# EAGLE board Rev2 Logicar (EAGLE 9.1.3)
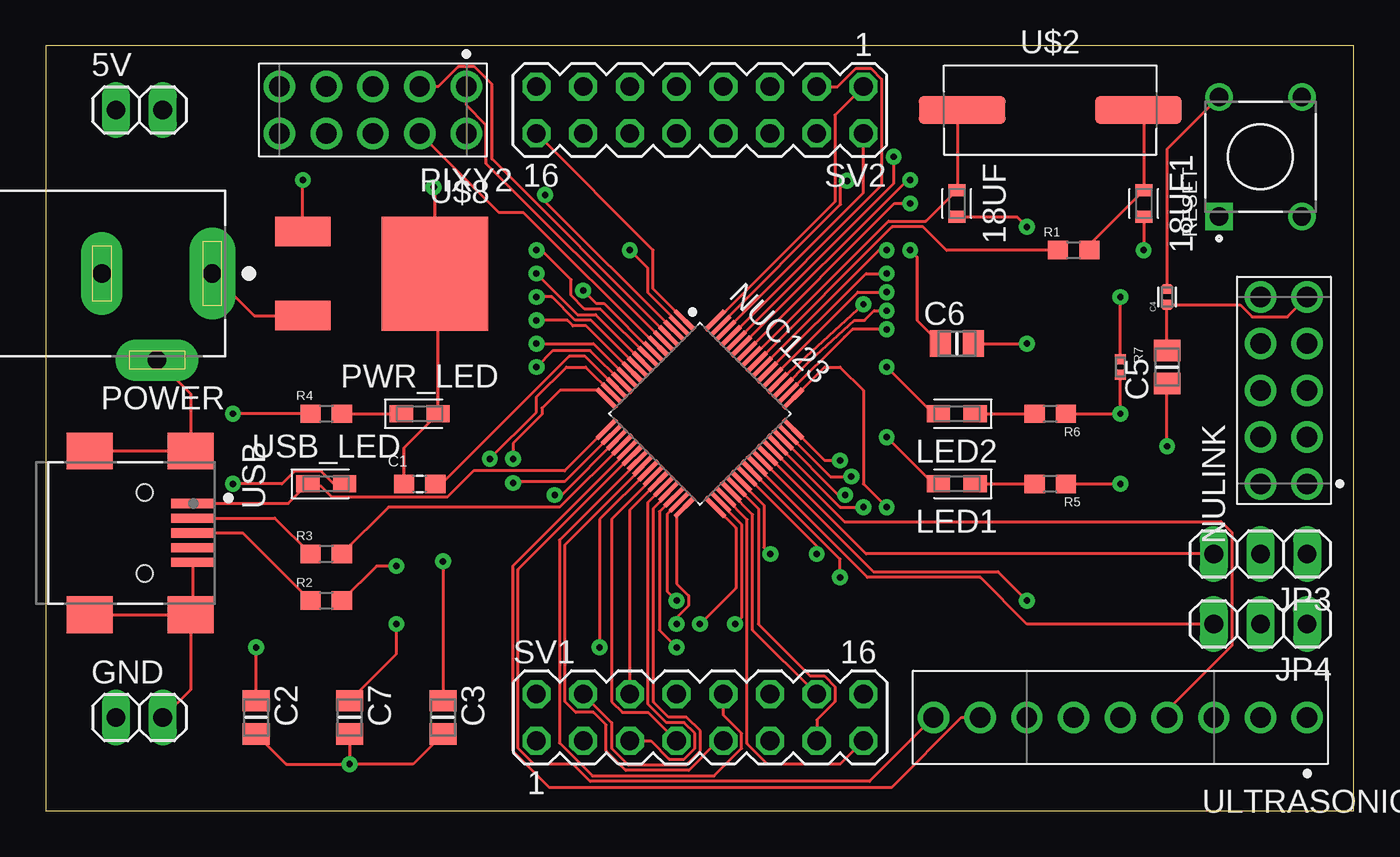
[diagram p0: board, top side]
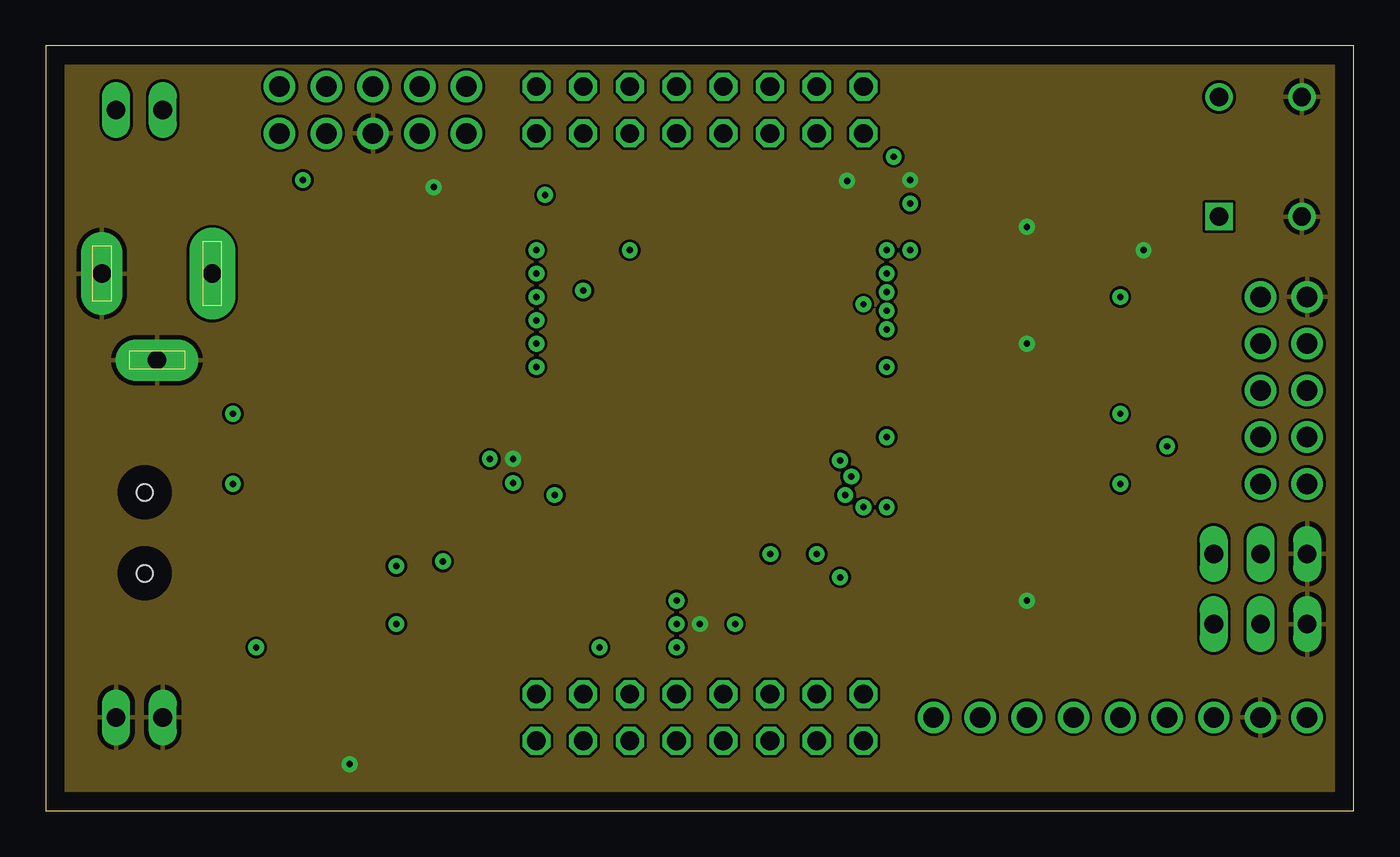
[diagram p1: board, inner layer Route2]
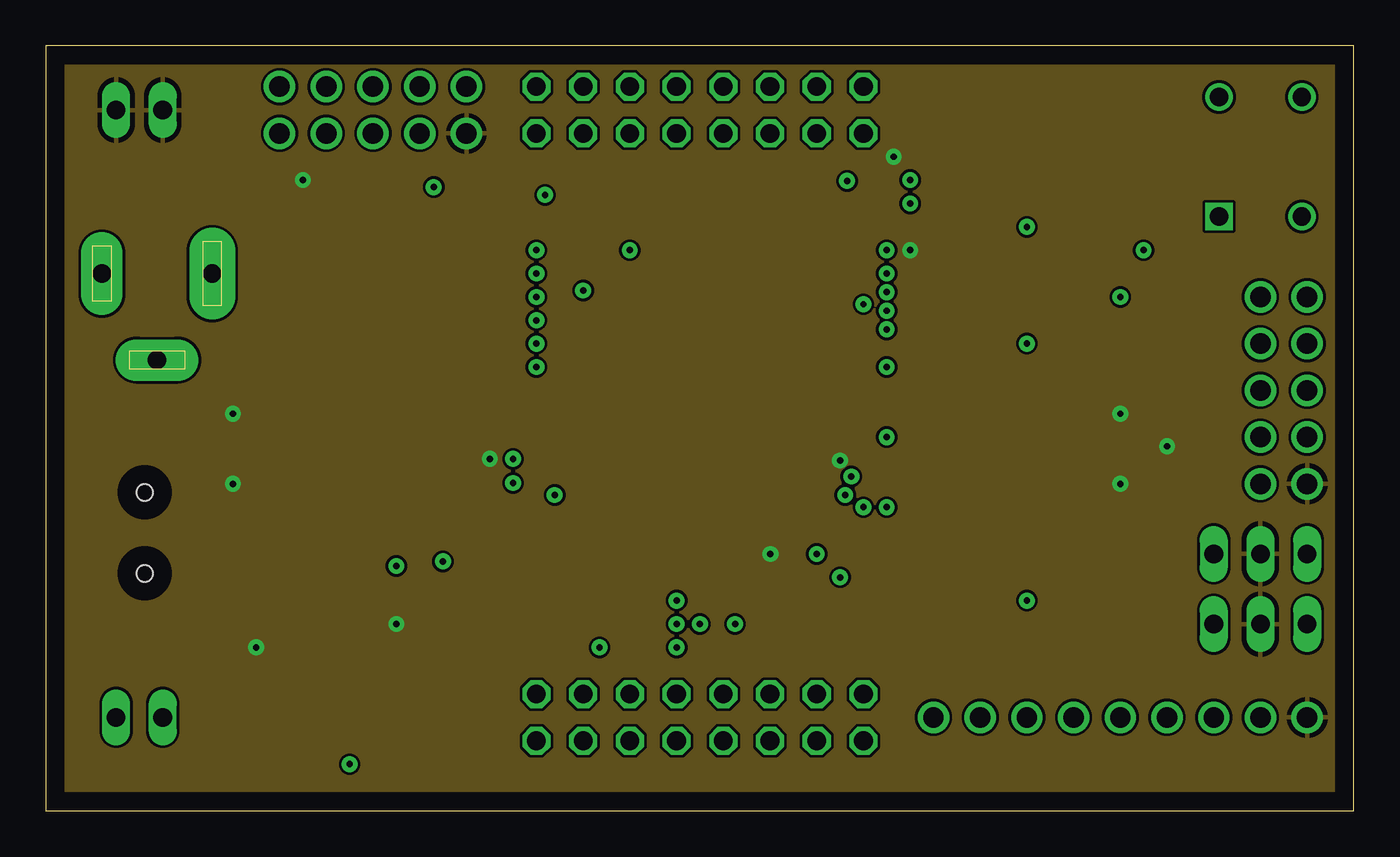
[diagram p2: board, inner layer Route15]
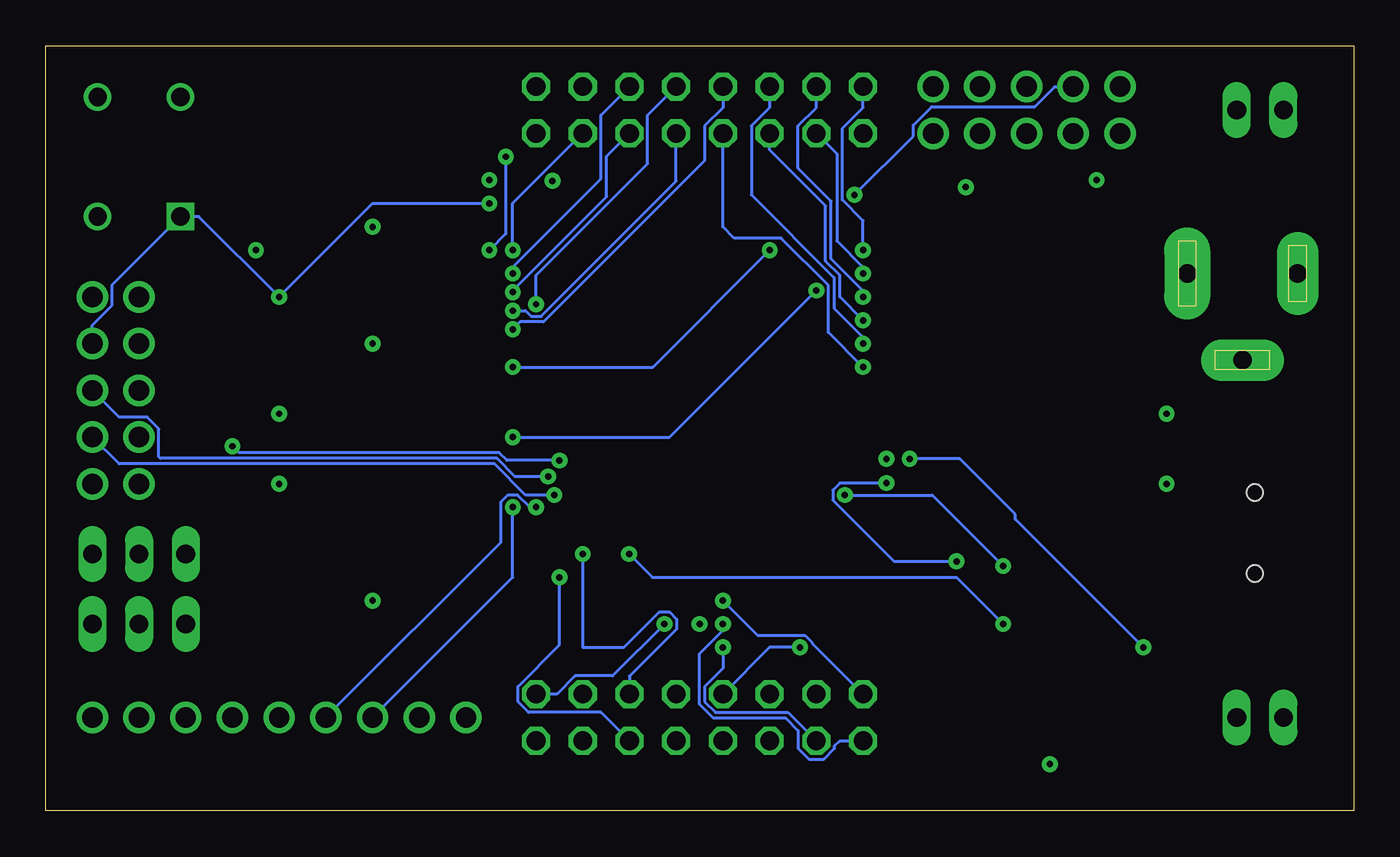
[diagram p3: board, bottom side, seen from below]

Size 71.1 x 41.58 mm. Coordinates in mm from the lower left corner, seen from the top.
Outline: 0,0 71.1,0 71.1,41.58 0,41.58 0,0
Copper layers (1*2*15*16): Top 0.035559375mm / dielectric 62mil / Route2 0.035559375mm / dielectric 62mil / Route15 0.035559375mm / dielectric 62mil / Bottom 0.035559375mm
Design rules "cmpe492-4Layer": minimum track width 6mil, minimum drill 8mil, track to track 6mil, track to pad 6mil, pad to pad 6mil, via to via 6mil, smd to smd 6mil, copper to edge 40mil, drill to drill 20mil, minimum pad ring 10mil, minimum via ring 10mil, stop-mask expansion 4mil, vias tented up to drill 0mil, thermal gap 10mil

## Footprints (pad centres in the part's own frame; a part is rotated, then mirrored left to right if it is on the bottom)
1X02 = drill 1.016 long: 1 -1.27,0; 2 1.27,0
CAPC1608X70 = smd 0.662 x 0.922: 1 -0.725,0; 2 0.725,0
CAPC1608X90 = smd 1.1 x 1: 1 -0.85,0; 2 0.85,0
CAPC2012X140N = smd 1.15 x 1.45: 1 -0.9,0; 2 0.9,0
CAPC1005X55N = smd 0.54 x 0.6: 1 -0.43,0; 2 0.43,0
1X03 = drill 1.016 long: 1 -2.54,0; 2 0,0; 3 2.54,0
LEDC2408X70 = smd 1.262 x 0.912: 1 -1,0; 2 1,0
QFP40P900X900X160-64 = smd 1.469 x 0.24: 1 -4.171,3; 2 -4.171,2.6; 3 -4.171,2.2; 4 -4.171,1.8; 5 -4.171,1.4; 6 -4.171,1; 7 -4.171,0.6; 8 -4.171,0.2; 9 -4.171,-0.2; 10 -4.171,-0.6; 11 -4.171,-1; 12 -4.171,-1.4; 13 -4.171,-1.8; 14 -4.171,-2.2; 15 -4.171,-2.6; 16 -4.171,-3; 33 4.171,-3; 34 4.171,-2.6; 35 4.171,-2.2; 36 4.171,-1.8; 37 4.171,-1.4; 38 4.171,-1; 39 4.171,-0.6; 40 4.171,-0.2; 41 4.171,0.2; 42 4.171,0.6; 43 4.171,1; 44 4.171,1.4; 45 4.171,1.8; 46 4.171,2.2; 47 4.171,2.6; 48 4.171,3 | smd 0.24 x 1.469: 17 -3,-4.171; 18 -2.6,-4.171; 19 -2.2,-4.171; 20 -1.8,-4.171; 21 -1.4,-4.171; 22 -1,-4.171; 23 -0.6,-4.171; 24 -0.2,-4.171; 25 0.2,-4.171; 26 0.6,-4.171; 27 1,-4.171; 28 1.4,-4.171; 29 1.8,-4.171; 30 2.2,-4.171; 31 2.6,-4.171; 32 3,-4.171; 49 3,4.171; 50 2.6,4.171; 51 2.2,4.171; 52 1.8,4.171; 53 1.4,4.171; 54 1,4.171; 55 0.6,4.171; 56 0.2,4.171; 57 -0.2,4.171; 58 -0.6,4.171; 59 -1,4.171; 60 -1.4,4.171; 61 -1.8,4.171; 62 -2.2,4.171; 63 -2.6,4.171; 64 -3,4.171
NUVI-LINK = drill 1.105 pad 1.705: 1 0,0; 2 2.54,0; 3 5.08,0; 4 7.62,0; 5 10.16,0; 6 10.16,2.54; 7 7.62,2.54; 8 5.08,2.54; 9 2.54,2.54; 10 0,2.54
PIXY2PIN = drill 1.105 pad 1.705: 1 0,0; 2 0,2.54; 3 2.54,0; 4 2.54,2.54; 5 5.08,0; 6 5.08,2.54; 7 7.62,0; 8 7.62,2.54; 9 10.16,0; 10 10.16,2.54
CUI_PJ-202A = drill 1 pad 2.5 long: 1 -6.5,0 | drill 1 pad 2.25 long: 2 -0.5,0; 3 -3.5,4.7
RESC1608X55 = smd 1.1 x 1: 1 -0.85,0; 2 0.85,0
RESC1005X40 = smd 0.54 x 0.6: 1 -0.43,0; 2 0.43,0
SW_1825910-6-4 = drill 0.99 square: 1 -3.25,2.25 | drill 0.99: 2 3.25,2.25; 3 -3.25,-2.25; 4 3.25,-2.25
MA08-2 = drill 1.016 octagon: 1 -8.89,-1.27; 2 -8.89,1.27; 3 -6.35,-1.27; 4 -6.35,1.27; 5 -3.81,-1.27; 6 -3.81,1.27; 7 -1.27,-1.27; 8 -1.27,1.27; 9 1.27,-1.27; 10 1.27,1.27; 11 3.81,-1.27; 12 3.81,1.27; 13 6.35,-1.27; 14 6.35,1.27; 15 8.89,-1.27; 16 8.89,1.27
XTAL1145X470X420 = smd 4.726 x 1.512: 1 -4.79,0; 2 4.79,0
DPAK3 = smd 3 x 1.6: P$1 0,-2.285; P$2 0,2.285 | smd 5.8 x 6.2: P$3 -7.18,0
HDRV9W64P254_1X9_1016X508X838B = drill 1.105 pad 1.705: 1 0,0; 2 2.54,0; 3 5.08,0; 4 7.62,0; 5 10.16,0; 6 12.7,0; 7 15.24,0; 8 17.78,0; 9 20.32,0
TE_1734035-3 = smd 0.5 x 2.3: 1 -1.6,3.65; 2 -0.8,3.65; 3 0,3.65; 4 0.8,3.65; 5 1.6,3.65 | smd 2 x 2.5: SH1 4.45,3.55; SH2 4.45,-1.95; SH3 -4.45,-1.95; SH4 -4.45,3.55 | hole 0.9: -2.2,1.05; 2.2,1.05

## Placement (x,y rotation side)
5V  [1X02]  5.08,38.1 0 top
18UF  [CAPC1608X70]  49.53,33.02 270 top
18UF1  [CAPC1608X70]  59.69,33.02 270 top
C1  [CAPC1608X90]  20.32,17.78 0 top
C2  [CAPC2012X140N]  11.43,5.08 270 top
C3  [CAPC2012X140N]  21.59,5.08 270 top
C4  GRJ155R60J106ME11D  [CAPC1005X55N]  60.96,27.94 90 top
C5  [CAPC2012X140N]  60.96,24.13 90 top
C6  [CAPC2012X140N]  49.53,25.4 0 top
C7  [CAPC2012X140N]  16.51,5.08 270 top
GND  [1X02]  5.08,5.08 0 top
JP3  [1X03]  66.04,13.97 180 top
JP4  [1X03]  66.04,10.16 180 top
LED1  [LEDC2408X70]  49.53,17.78 180 top
LED2  [LEDC2408X70]  49.53,21.59 180 top
NUC123  [QFP40P900X900X160-64]  35.56,21.59 315 top
NULINK  [NUVI-LINK]  68.58,17.78 90 top
PIXY2  [PIXY2PIN]  22.86,39.37 180 top
POWER  [CUI_PJ-202A]  2.54,29.21 180 top
PWR_LED  [LEDC2408X70]  20.32,21.59 0 top
R1  [RESC1608X55]  55.88,30.48 0 top
R2  ERJ-3GEYJ331V  [RESC1608X55]  15.24,11.43 0 top
R3  [RESC1608X55]  15.24,13.97 0 top
R4  [RESC1608X55]  15.24,21.59 0 top
R5  ERJ-3GEYJ331V  [RESC1608X55]  54.61,17.78 180 top
R6  ERJ-3GEYJ331V  [RESC1608X55]  54.61,21.59 180 top
R7  ERA-2AED103X  [RESC1005X40]  58.42,24.13 270 top
RESET  [SW_1825910-6-4]  66.04,35.56 90 top
SV1  [MA08-2]  35.56,5.08 0 top
SV2  [MA08-2]  35.56,38.1 180 top
U$2  CRYSTAL_OSS  [XTAL1145X470X420]  54.61,38.1 0 top
U$8  NCP5501  [DPAK3]  13.97,29.21 180 top
ULTRASONIC  [HDRV9W64P254_1X9_1016X508X838B]  68.58,5.08 180 top
USB  1734035-3  [TE_1734035-3]  4.32,15.11 270 top
USB_LED  [LEDC2408X70]  15.24,17.78 0 top

## Library data of the parts
5V GND JP3 JP4 = pinhead
18UF 18UF1 LED1 LED2 NUC123 NULINK PIXY2 PWR_LED U$2 U$8 ULTRASONIC USB_LED = Logicar Rev 2 Lib
C1 = Logicar Rev 2 Lib; DESCRIPTION: Cap Tant Solid 47uF 6.3V M CASE 20% _1.6 X 0.85 X 0.8mm_ SMD 1608-09 0.3 Ohm 105°C T/R; MF: AVX; MP: F380J476MMAAXEH3; PACKAGE: 0603 AVX
C2 C3 C5-C7 = Logicar Rev 2 Lib; DESCRIPTION: CL21 Series 0.1uF 50 V -20/+80% Tolerance Y5V SMT Multilayer Ceramic Capacitor; DIGI-KEY_PART_NUMBER: 1276-1007-1-ND; DIGI-KEY_PURCHASE_URL: https://www.digikey.com/product-detail/en/samsung-electro-mechanics/CL21F104ZBCNNNC/1276-1007-1-ND/3889093?utm_source=snapeda&utm_medium=aggregator&utm_campaign=symbol; MF: Samsung Electro-Mechanics; MP: CL21F104ZBCNNNC; PACKAGE: 0805 Samsung
C4 = Logicar Rev 2 Lib; DESCRIPTION: Capacitor Ceramic Mlcc 0402 10uf 6.3v Smd; DIGI-KEY_PART_NUMBER: 490-13211-1-ND; DIGI-KEY_PURCHASE_URL: https://www.digikey.com/product-detail/en/murata-electronics-north-america/GRJ155R60J106ME11D/490-13211-1-ND/5877419?utm_source=snapeda&utm_medium=aggregator&utm_campaign=symbol; MF: Murata; MP: GRJ155R60J106ME11D; PACKAGE: 0402 Murata
POWER = Logicar Rev 2 Lib; CUI_PURCHASE_URL: https://www.cui.com/product/interconnect/dc-power-connectors/jacks/2.0-mm-center-pin/pj-202a?utm_source=snapeda.com&utm_medium=referral&utm_campaign=snapedaBOM; DESCRIPTION: 2.0 mm Center Pin, 2.5 A, Right Angle, Through Hole, Kinked Pins, Dc Power Jack Connector; DIGI-KEY_PART_NUMBER: CP-202A-ND; DIGI-KEY_PURCHASE_URL: https://www.digikey.com/product-detail/en/cui-inc/PJ-202A/CP-202A-ND/252007?utm_source=snapeda&utm_medium=aggregator&utm_campaign=symbol; MF: CUI Inc.; MP: PJ-202A; PACKAGE: None
R1-R6 = Logicar Rev 2 Lib; DESCRIPTION: Res Thick Film 0603 330 Ohm 5% 0.1W_1/10W_ ?200ppm/C Molded SMD Automotive Punched T/R; DIGI-KEY_PART_NUMBER: P330GCT-ND; DIGI-KEY_PURCHASE_URL: https://www.digikey.com/product-detail/en/panasonic-electronic-components/ERJ-3GEYJ331V/P330GCT-ND/134778?utm_source=snapeda&utm_medium=aggregator&utm_campaign=symbol; MF: Panasonic; MP: ERJ-3GEYJ331V; PACKAGE: 0603 Panasonic
R7 = Logicar Rev 2 Lib; DESCRIPTION: Res Thin Film 0402 10K Ohm 0.5% 0.063W_1/16W_ }25ppm/C Molded SMD Automotive Punched T/R; DIGI-KEY_PART_NUMBER: P10KDECT-ND; DIGI-KEY_PURCHASE_URL: https://www.digikey.com/product-detail/en/panasonic-electronic-components/ERA-2AED103X/P10KDECT-ND/1706304?utm_source=snapeda&utm_medium=aggregator&utm_campaign=symbol; MF: Panasonic; MP: ERA-2AED103X; PACKAGE: 0402 Panasonic
RESET = Logicar Rev 2 Lib; COMMENT: 1825910-6; DESCRIPTION: Switch Push Button OFF _ON_ SPST Round Button 0.05A 24VDC Momentary Contact PC Pins Thru-Hole; DIGI-KEY_PART_NUMBER: 450-1650-ND; DIGI-KEY_PURCHASE_URL: https://www.digikey.com/product-detail/en/te-connectivity-alcoswitch-switches/1825910-6/450-1650-ND/1632536?utm_source=snapeda&utm_medium=aggregator&utm_campaign=symbol; MF: TE Connectivity; MP: 1825910-6; PACKAGE: None; TE_PURCHASE_URL: https://www.te.com/usa-en/product-1825910-6.html?te_bu=Cor&te_type=disp&te_campaign=seda_glo_cor-seda-global-disp-prtnr-fy19-seda-model-bom-cta_sma-317_1&elqCampaignId=32493
SV1 SV2 = con-lstb; OC_FARNELL: unknown; OC_NEWARK: unknown
USB = Logicar Rev 2 Lib; COMMENT: 1734035-3; DESCRIPTION: Conn Mini USB 2.0 Type B RCP 5 POS 0.8mm Solder RA SMD 5 Terminal 1 Port T/R; DIGI-KEY_PART_NUMBER: A121553CT-ND; DIGI-KEY_PURCHASE_URL: https://www.digikey.com/product-detail/en/te-connectivity-amp-connectors/1734035-3/A121553CT-ND/5246532?utm_source=snapeda&utm_medium=aggregator&utm_campaign=symbol; EU_ROHS_COMPLIANCE: Compliant; MF: TE Connectivity; MP: 1734035-3; PACKAGE: None; TE_PURCHASE_URL: https://www.te.com/usa-en/product-1734035-3.html?te_bu=Cor&te_type=disp&te_campaign=seda_glo_cor-seda-global-disp-prtnr-fy19-seda-model-bom-cta_sma-317_1&elqCampaignId=32493

## Nets
CLK: NUC123.47 NULINK.3
CLOCK_IN: 18UF.1 NUC123.57 U$2.1
CLOCK_OUT: NUC123.56 R1.1
COMPTRIG: NUC123.45 ULTRASONIC.6
D+: NUC123.19 R2.2
D-: NUC123.20 R3.2
DAC_OUT: NUC123.49 ULTRASONIC.7
DAT: NUC123.46 NULINK.2
ECHO: NUC123.44 ULTRASONIC.4
GND: 18UF1.2 18UF.2 C1.1 C2.2 C3.2 C4.1 C5.2 C6.2 C7.2 GND.1 GND.2 JP3.1 JP4.1 NUC123.16 NUC123.33 NUC123.42 NUC123.59 NUC123.63 NULINK.5 PIXY2.6 POWER.2 POWER.3 PWR_LED.2 RESET.3 RESET.4 U$8.P$3 ULTRASONIC.2 USB.5 USB.SH1 USB.SH2 USB.SH3 USB.SH4
LED1: LED1.2 NUC123.7
LED2: LED2.2 NUC123.2
MISO0: NUC123.5 PIXY2.1
MOSI0: NUC123.6 PIXY2.4
MOTOR: JP3.3 NUC123.43
N$1: C3.1 NUC123.18
N$2: C1.2 NUC123.14
N$3: 18UF1.1 R1.2 U$2.2
N$4: C4.2 RESET.2
N$5: R2.1 USB.3
N$6: R3.1 USB.2
N$7: PWR_LED.1 R4.2
N$8: POWER.1 U$8.P$2
N$11: LED1.1 R5.2
N$12: LED2.1 R6.2
PIN1: NUC123.32 SV1.1
PIN2: NUC123.31 SV1.2
PIN3: NUC123.30 SV1.3
PIN4: NUC123.29 SV1.4
PIN5: NUC123.28 SV1.5
PIN6: NUC123.27 SV1.6
PIN7: NUC123.26 SV1.7
PIN8: NUC123.25 SV1.8
PIN9: NUC123.24 SV1.9
PIN10: NUC123.23 SV1.10
PIN11: NUC123.40 SV1.11
PIN12: NUC123.39 SV1.12
PIN13: NUC123.37 SV1.13
PIN14: NUC123.36 SV1.14
PIN15: NUC123.35 SV1.15
PIN16: NUC123.34 SV1.16
PIN17: NUC123.64 SV2.1
PIN18: NUC123.62 SV2.2
PIN19: NUC123.61 SV2.3
PIN20: NUC123.55 SV2.4
PIN21: NUC123.54 SV2.5
PIN22: NUC123.53 SV2.6
PIN23: NUC123.52 SV2.7
PIN24: NUC123.51 SV2.8
PIN25: NUC123.50 SV2.9
PIN26: NUC123.13 SV2.10
PIN27: NUC123.12 SV2.11
PIN28: NUC123.11 SV2.12
PIN29: NUC123.10 SV2.13
PIN30: NUC123.9 SV2.14
PIN31: NUC123.8 SV2.15
PIN32: NUC123.1 SV2.16
RESET: NUC123.58 NULINK.4 R7.1 RESET.1
RXD: NUC123.21 ULTRASONIC.8
SCLK: NUC123.4 PIXY2.3
SERVO: JP4.3 NUC123.41
SS0: NUC123.3 PIXY2.7
TXD: NUC123.22 ULTRASONIC.9
USB_VBUS: NUC123.17 USB.1 USB_LED.1
VDD: 5V.1 5V.2 C2.1 C5.1 C6.1 C7.1 JP3.2 JP4.2 NUC123.15 NUC123.38 NUC123.48 NUC123.60 NULINK.1 PIXY2.2 R4.1 R5.1 R6.1 R7.2 U$8.P$1 ULTRASONIC.1 USB_LED.2

## Tracks (layer width: path | path; a pad name or v marks a point on that pad's centre or on a via)
CLK  (via drill 0.35)
  Top 0.152: NUC123.47 42.65,18.18 v43.79,18.18
  Bottom 0.152: v43.79,18.18 45.6,18.18 46.58,19.17 64.89,19.17 64.96,19.24 64.96,20.77 65.59,21.4 67.12,21.4 NULINK.3
CLOCK_IN
  Top 0.152: NUC123.57 38.44,24.68 45.81,32.05 47.84,32.05 18UF.1 49.57,33.78 49.57,37.85 U$2.1
CLOCK_OUT
  Top 0.152: NUC123.56 46,31.75 47.69,31.75 48.97,30.47 55.02,30.47 R1.1
COMPTRIG  (via drill 0.35)
  Top 0.152: NUC123.45 43.19,16.51 v44.45,16.51
  Bottom 0.152: ULTRASONIC.6 46.38,14.58 46.38,16.78 45.99,17.17 45.45,17.17 44.79,16.51 v44.45,16.51
D+  (via drill 0.35)
  Top 0.152: NUC123.19 28.03,17.17 v27.66,17.17 | R2.2 17.97,13.31 v19.05,13.31
  Bottom 0.152: v27.66,17.17 22.91,17.17 v19.05,13.31
D-
  Top 0.152: NUC123.20 27.93,16.51 18.63,16.51 R3.2
DAC_OUT  (via drill 0.35)
  Top 0.152: NUC123.49 42.34,24.13 43.18,24.13 44.45,22.86 44.45,17.78 v45.72,16.51
  Bottom 0.152: ULTRASONIC.7 45.72,12.7 v45.72,16.51
DAT  (via drill 0.35)
  Top 0.152: NUC123.46 43.09,17.17 v43.46,17.17
  Bottom 0.152: v43.46,17.17 45.02,17.17 46.71,18.86 67.12,18.86 NULINK.2
ECHO
  Top 0.152: NUC123.44 43.41,15.72 63.91,15.72 64.49,15.14 64.49,8.99 60.96,5.46 ULTRASONIC.4
GND  (via drill 0.35)
  Top 0.152: C2.2 13.07,2.54 v16.51,2.54 | C7.2 v16.51,2.54 | C3.2 19.95,2.54 v16.51,2.54 | NUC123.59 46.85,34.29 v46.99,34.29 | NULINK.5 67.5,26.86 65.59,26.86 64.94,27.51 C4.1 C5.2 | NUC123.42 44.99,13 51.77,13 v53.34,11.43 | NUC123.16 30.05,22.86 27.94,22.86 26.98,21.89 26.98,21.55 25.4,19.98 v25.4,19.14 | C1.1 19.47,19.74 PWR_LED.2 21.32,29.04 U$8.P$3 21.15,33.84 v21.08,33.91 | USB.SH3 USB.SH4 7.87,22.68 POWER.3 | USB.SH2 USB.SH1 | NUC123.63 36.67,26.44 43.2,32.97 43.2,33.9 v43.56,34.25 | NUC123.33 37.52,15.39 37.52,12.12 v35.56,10.16 | USB.5 7.97,10.76 USB.SH1 | USB.SH1 7.87,6.6 GND.2 | 18UF.2 52.8,32.3 v53.34,31.75 | C6.2 v53.34,25.4 | 18UF1.2 v59.69,30.48
  pour Route2: -1.27,41.91 -1.27,-1.27 72.39,-1.27 72.39,43.18 -1.27,43.18
LED1  (via drill 0.35)
  Top 0.152: LED1.2 48.26,17.78 v45.72,20.32 | NUC123.7 32.96,24.96 30.34,27.59 29.92,27.59 v29.21,28.29
  Bottom 0.152: v45.72,20.32 37.18,20.32 v29.21,28.29
LED2  (via drill 0.35)
  Top 0.152: LED2.2 48.26,21.59 v45.72,24.13 | v31.75,30.48 32.72,29.52 32.72,28.18 34.45,26.45 NUC123.2
  Bottom 0.152: v45.72,24.13 38.1,24.13 v31.75,30.48
MISO0
  Top 0.152: NUC123.5 23.94,35.19 23.94,37.28 22.86,38.36 PIXY2.1
MOSI0
  Top 0.152: PIXY2.4 24.61,32.54 25.95,32.54 33.24,25.25 NUC123.6
MOTOR
  Top 0.152: JP3.3 44.59,13.97 NUC123.43
N$1  (via drill 0.35)
  Top 0.152: NUC123.18 28.2,17.91 25.48,17.91 v25.4,17.83 | v21.59,13.57 C3.1
  Bottom 0.152: v25.4,17.83 27.93,17.83 28.32,17.44 28.32,16.89 24.99,13.57 v21.59,13.57
N$2
  Top 0.152: NUC123.14 29.32,24.71 28.45,24.71 21.51,17.78 C1.2
N$3
  Top 0.152: U$2.2 59.69,37.81 18UF1.1 56.73,30.78 R1.2
N$4
  Top 0.152: RESET.2 60.96,35.98 C4.2
N$5
  Top 0.152: USB.3 10.71,15.11 R2.1
N$6
  Top 0.152: USB.2 12.45,15.91 R3.1
N$7
  Top 0.152: R4.2 PWR_LED.1
N$8
  Top 0.152: POWER.1 11.32,26.92 U$8.P$2
N$11
  Top 0.152: LED1.1 R5.2
N$12
  Top 0.152: LED2.1 R6.2
PIN1  (via drill 0.35)
  Top 0.152: NUC123.32 34.29,16.08 34.29,12.36 34.95,11.7 34.95,11.16 34.29,10.5 v34.29,10.16
  Bottom 0.152: SV1.1 27.94,3.81 28.22,3.53 28.22,3.4 28.8,2.82 29.62,2.82 30.2,3.4 30.2,4.37 30.89,5.05 34.83,5.05 35.59,5.81 35.59,8.52 34.29,9.82 v34.29,10.16
PIN2  (via drill 0.35)
  Top 0.152: NUC123.31 33.78,16.14 33.78,11.94 v34.29,11.43
  Bottom 0.152: v34.29,11.43 32.41,9.55 29.83,9.55 29.44,9.16 29.44,9.12 SV1.2
PIN3  (via drill 0.35)
  Top 0.152: NUC123.30 33.35,16.27 33.35,9.83 v34.29,8.89
  Bottom 0.152: SV1.3 30.76,5.36 34.7,5.36 35.28,5.94 35.28,6.76 34.29,7.75 v34.29,8.89
PIN4
  Top 0.152: NUC123.29 33.88,17.3 33.05,16.46 33.05,5.92 33.86,5.1 34.83,5.1 35.59,4.35 35.59,3.27 34.83,2.52 31.64,2.52 30.76,3.4 30.76,4.8 SV1.4
PIN5
  Top 0.152: NUC123.28 32.74,16.79 32.74,5.79 33.73,4.8 34.7,4.8 35.28,4.22 35.28,3.4 34.7,2.82 33.88,2.82 32.89,3.81 SV1.5
PIN6
  Top 0.152: SV1.6 31.75,16.37 NUC123.27
PIN7
  Top 0.152: NUC123.26 33.03,18.14 30.76,15.87 30.76,5.94 31.34,5.36 32.74,5.36 SV1.7
PIN8  (via drill 0.35)
  Top 0.152: NUC123.25 30.1,15.85 v30.1,8.89
  Bottom 0.152: v30.1,8.89 31.75,8.89 SV1.8
PIN9
  Top 0.152: NUC123.24 32.47,18.71 28.22,14.46 28.22,5.94 28.8,5.36 29.77,5.36 30.45,4.67 30.45,3.27 31.52,2.21 34.95,2.21 36.55,3.81 SV1.9
PIN10
  Top 0.152: NUC123.23 32.19,18.99 27.91,14.72 27.91,3.7 29.71,1.91 36.33,1.91 37.82,3.4 37.82,4.22 36.83,5.21 SV1.10
PIN11  (via drill 0.35)
  Top 0.152: v43.18,12.7 43.18,13.69 NUC123.40
  Bottom 0.152: v43.18,12.7 43.18,9.02 45.44,6.76 45.44,5.94 44.86,5.36 40.92,5.36 SV1.11
PIN12  (via drill 0.35)
  Top 0.152: NUC123.39 41.91,14.39 v41.91,13.97
  Bottom 0.152: v41.91,13.97 41.91,8.89 39.67,8.89 37.74,10.82 37.2,10.82 36.81,10.43 36.81,9.89 39.37,7.33 SV1.12
PIN13
  Top 0.152: NUC123.37 38.73,16.44 38.73,10.16 41.55,7.34 42.32,7.34 42.9,6.76 42.9,5.94 41.91,4.95 SV1.13
PIN14
  Top 0.152: SV1.14 38.43,9.83 38.43,16.1 37.24,17.3 NUC123.36
PIN15
  Top 0.152: SV1.15 43.18,2.54 39.24,2.54 38.12,3.65 38.12,15.84 36.95,17.01 NUC123.35
PIN16  (via drill 0.35)
  Top 0.152: NUC123.34 36.67,16.73 37.82,15.58 37.82,10.51 v37.47,10.16
  Bottom 0.152: v37.47,10.16 40.29,7.34 42.32,7.34 43.31,6.35 SV1.16
PIN17
  Top 0.152: SV2.1 42.9,37.82 42.9,33.1 36.46,26.66 NUC123.64
PIN18
  Top 0.152: NUC123.62 44.45,33.59 SV2.2
PIN19
  Top 0.152: SV2.3 43.05,39.37 44.04,40.36 44.86,40.36 45.44,39.78 45.44,34.02 NUC123.61
PIN20  (via drill 0.35)
  Top 0.152: NUC123.55 45.3,30.48 v45.72,30.48
  Bottom 0.152: v45.72,30.48 45.72,33.02 SV2.4
PIN21  (via drill 0.35)
  Top 0.152: NUC123.54 44.59,29.21 v45.72,29.21
  Bottom 0.152: v45.72,29.21 45.72,29.55 40.92,34.35 40.92,37.82 SV2.5
PIN22  (via drill 0.35)
  Top 0.152: NUC123.53 44.15,28.2 v45.72,28.2
  Bottom 0.152: v45.72,28.2 45.72,28.28 40.62,33.39 40.62,35.58 SV2.6
PIN23  (via drill 0.35)
  Top 0.152: NUC123.52 v44.45,27.54
  Bottom 0.152: v44.45,27.54 44.45,29.12 38.38,35.19 38.38,37.82 SV2.7
PIN24  (via drill 0.35)
  Top 0.152: NUC123.51 41.59,24.51 43.95,26.67 44.51,26.67 45.03,27.19 v45.72,27.19
  Bottom 0.152: v45.72,27.19 45.03,27.19 44.72,26.88 44.18,26.88 36.83,34.23 SV2.8
PIN25  (via drill 0.35)
  Top 0.152: v45.72,26.18 43.86,26.18 43.41,25.76 NUC123.50
  Bottom 0.152: SV2.9 34.29,38.23 35.28,37.24 35.28,35.35 44.05,26.58 45.32,26.58 v45.72,26.18
PIN26  (via drill 0.35)
  Top 0.152: NUC123.13 29.59,25.02 27.56,25.02 v26.67,24.13
  Bottom 0.152: SV2.10 34.29,31.75 33.68,31.14 31.12,31.14 28.55,28.56 28.55,26.01 v26.67,24.13
PIN27  (via drill 0.35)
  Top 0.152: v26.67,25.4 29.77,25.4 NUC123.12
  Bottom 0.152: SV2.11 31.75,38.23 32.74,37.24 32.74,33.49 28.25,28.99 28.25,27.31 26.67,25.74 v26.67,25.4
PIN28  (via drill 0.35)
  Top 0.152: NUC123.11 29.37,26.37 28.65,26.37 28.35,26.67 v26.67,26.67
  Bottom 0.152: v26.67,26.67 27.94,27.94 27.94,29.12 28.71,29.89 28.71,32.89 31.75,35.93 SV2.12
PIN29  (via drill 0.35)
  Top 0.152: NUC123.10 29.63,26.67 28.78,26.67 27.51,27.94 v26.67,27.94
  Bottom 0.152: v26.67,27.94 26.67,28.28 28.41,30.02 28.41,33.15 30.2,34.94 30.2,37.24 29.21,38.23 SV2.13
PIN30  (via drill 0.35)
  Top 0.152: NUC123.9 29.89,26.98 28.9,26.98 v26.67,29.21
  Bottom 0.152: SV2.14 28.1,35.72 28.1,30.98 26.67,29.55 v26.67,29.21
PIN31  (via drill 0.35)
  Top 0.152: v26.67,30.48 26.95,30.48 28.55,28.88 28.55,28.02 29.29,27.28 30.15,27.28 NUC123.8
  Bottom 0.152: SV2.15 26.67,38.23 27.8,37.11 27.8,33.22 26.67,32.09 v26.67,30.48
PIN32
  Top 0.152: NUC123.1 33.02,28.37 33.02,30.48 SV2.16
RESET  (via drill 0.35)
  Top 0.152: NUC123.58 46.14,33.02 v46.99,33.02 | R7.1 v58.42,27.94
  Bottom 0.152: NULINK.4 68.58,26.41 67.5,27.49 67.5,28.6 RESET.1 62.79,32.31 v58.42,27.94 53.34,33.02 v46.99,33.02
RXD
  Top 0.152: NUC123.21 31.62,19.56 25.38,13.31 25.38,3.27 27.35,1.3 46,1.3 49.79,5.08 ULTRASONIC.8
SCLK
  Top 0.152: NUC123.4 24.25,35.45 24.25,39.51 23.31,40.45 22.41,40.45 21.33,39.37 PIXY2.3
SERVO
  Top 0.152: JP4.3 53.34,10.16 50.8,12.7 44.66,12.7 38.65,18.71 NUC123.41
SS0  (via drill 0.35)
  Top 0.152: NUC123.3 27.14,33.12 v27.14,33.49
  Bottom 0.152: v27.14,33.49 23.94,36.68 23.94,37.28 22.93,38.29 17.33,38.29 16.25,39.37 PIXY2.7
TXD
  Top 0.152: ULTRASONIC.9 44.78,1.6 29.59,1.6 28.65,2.54 26.54,2.54 25.68,3.4 25.68,13.12 NUC123.22
USB_VBUS
  Top 0.152: USB.1 13.17,16.71 14.11,17.64 | 14.11,17.64 USB_LED.1 | 14.11,17.64 14.96,17.64 15.56,17.05 21.82,17.05 23.25,18.48 28.21,18.48 NUC123.17
VDD  (via drill 0.35)
  Top 0.152: R4.1 v10.16,21.59 | v10.16,17.78 12.83,17.78 13.51,18.47 14.97,18.47 15.65,17.78 USB_LED.2 | NUC123.60 46.1,34.11 v46.1,35.56 | v46.99,30.48 47.36,30.11 47.36,26.67 C6.1 | NUC123.48 42.34,19.05 v43.18,19.05 | v60.96,19.82 C5.1 | NUC123.38 37.8,17.86 39.04,16.62 39.04,14.32 v39.39,13.97 | C7.1 19.05,8.52 v19.05,10.16 | C2.1 v11.43,8.89 | v24.13,19.14 26.67,21.68 26.67,22.5 28.3,24.13 29.34,24.13 NUC123.15 | U$8.P$1 v13.97,34.29 | R6.1 v58.42,21.59 R7.2 | R5.1 v58.42,17.78
  Bottom 0.152: v46.1,35.56 46.1,31.37 v46.99,30.48 | v43.18,19.05 46.04,19.05 46.46,19.47 60.61,19.47 v60.96,19.82 | v11.43,8.89 18.39,15.85 18.39,16.12 21.41,19.14 v24.13,19.14 | v39.39,13.97 38.12,12.7 21.59,12.7 v19.05,10.16
  pour Route15: -2.54,43.18 -2.54,-2.54 73.66,-2.54 73.66,44.45 -2.54,44.45